# Altium PCB EIS_Flow.PcbDoc
Units mm, origin at the board's own origin, x right, y up, seen from the top; angles counter-clockwise.
Board outline 40 x 40 mm, 4 copper layers (Top Layer, Signal Layer 1, Signal Layer 2, Bottom Layer), stack 1.12 mm thick; 43 components, 30 nets, 141 pads, 53 vias.
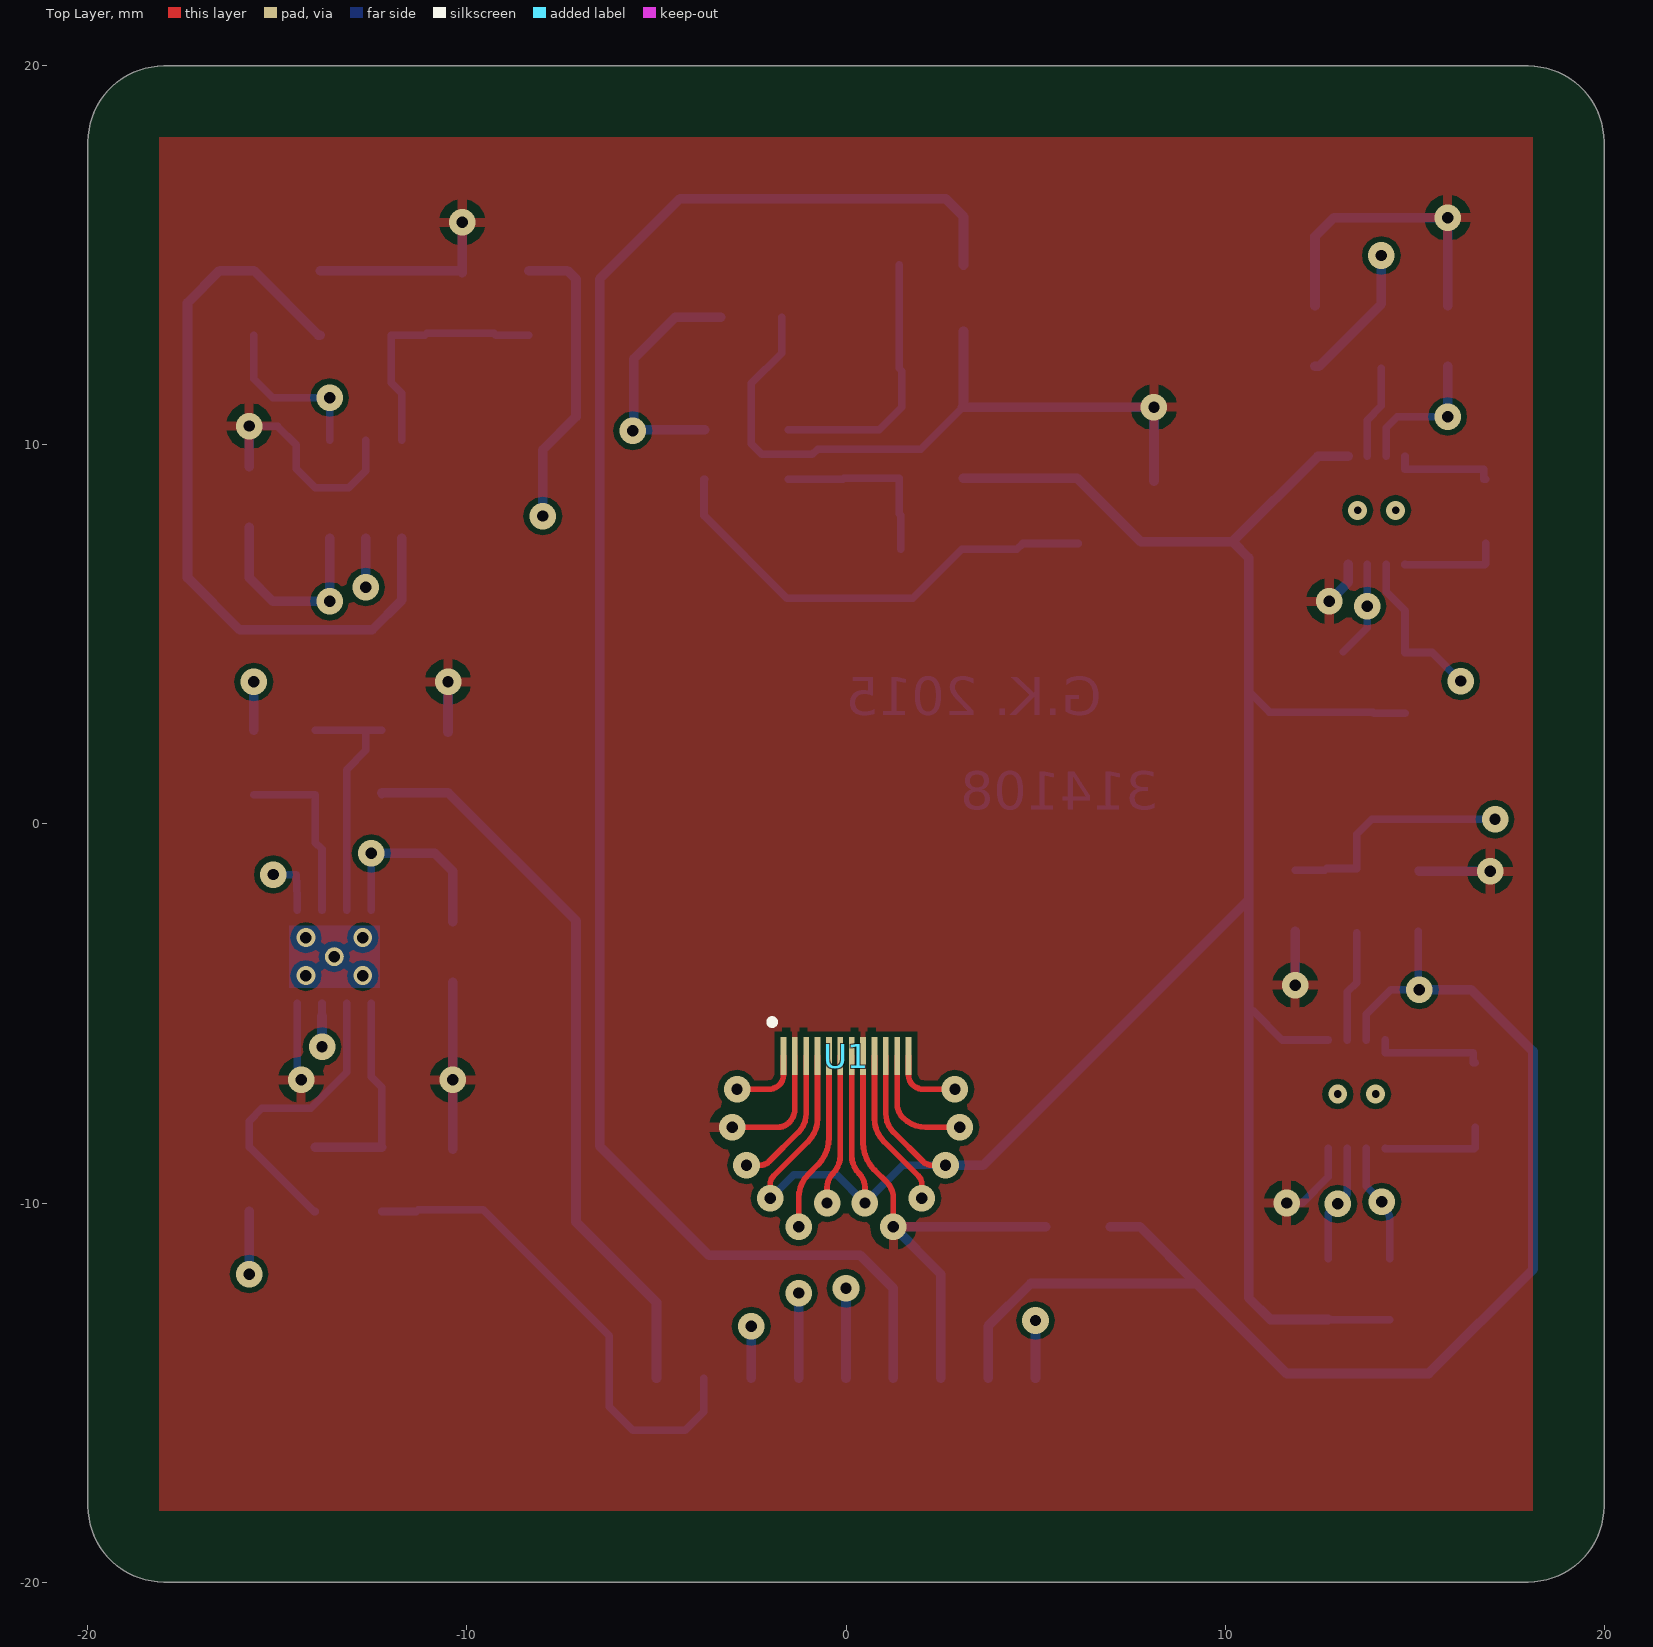
[diagram p0: Top Layer view]
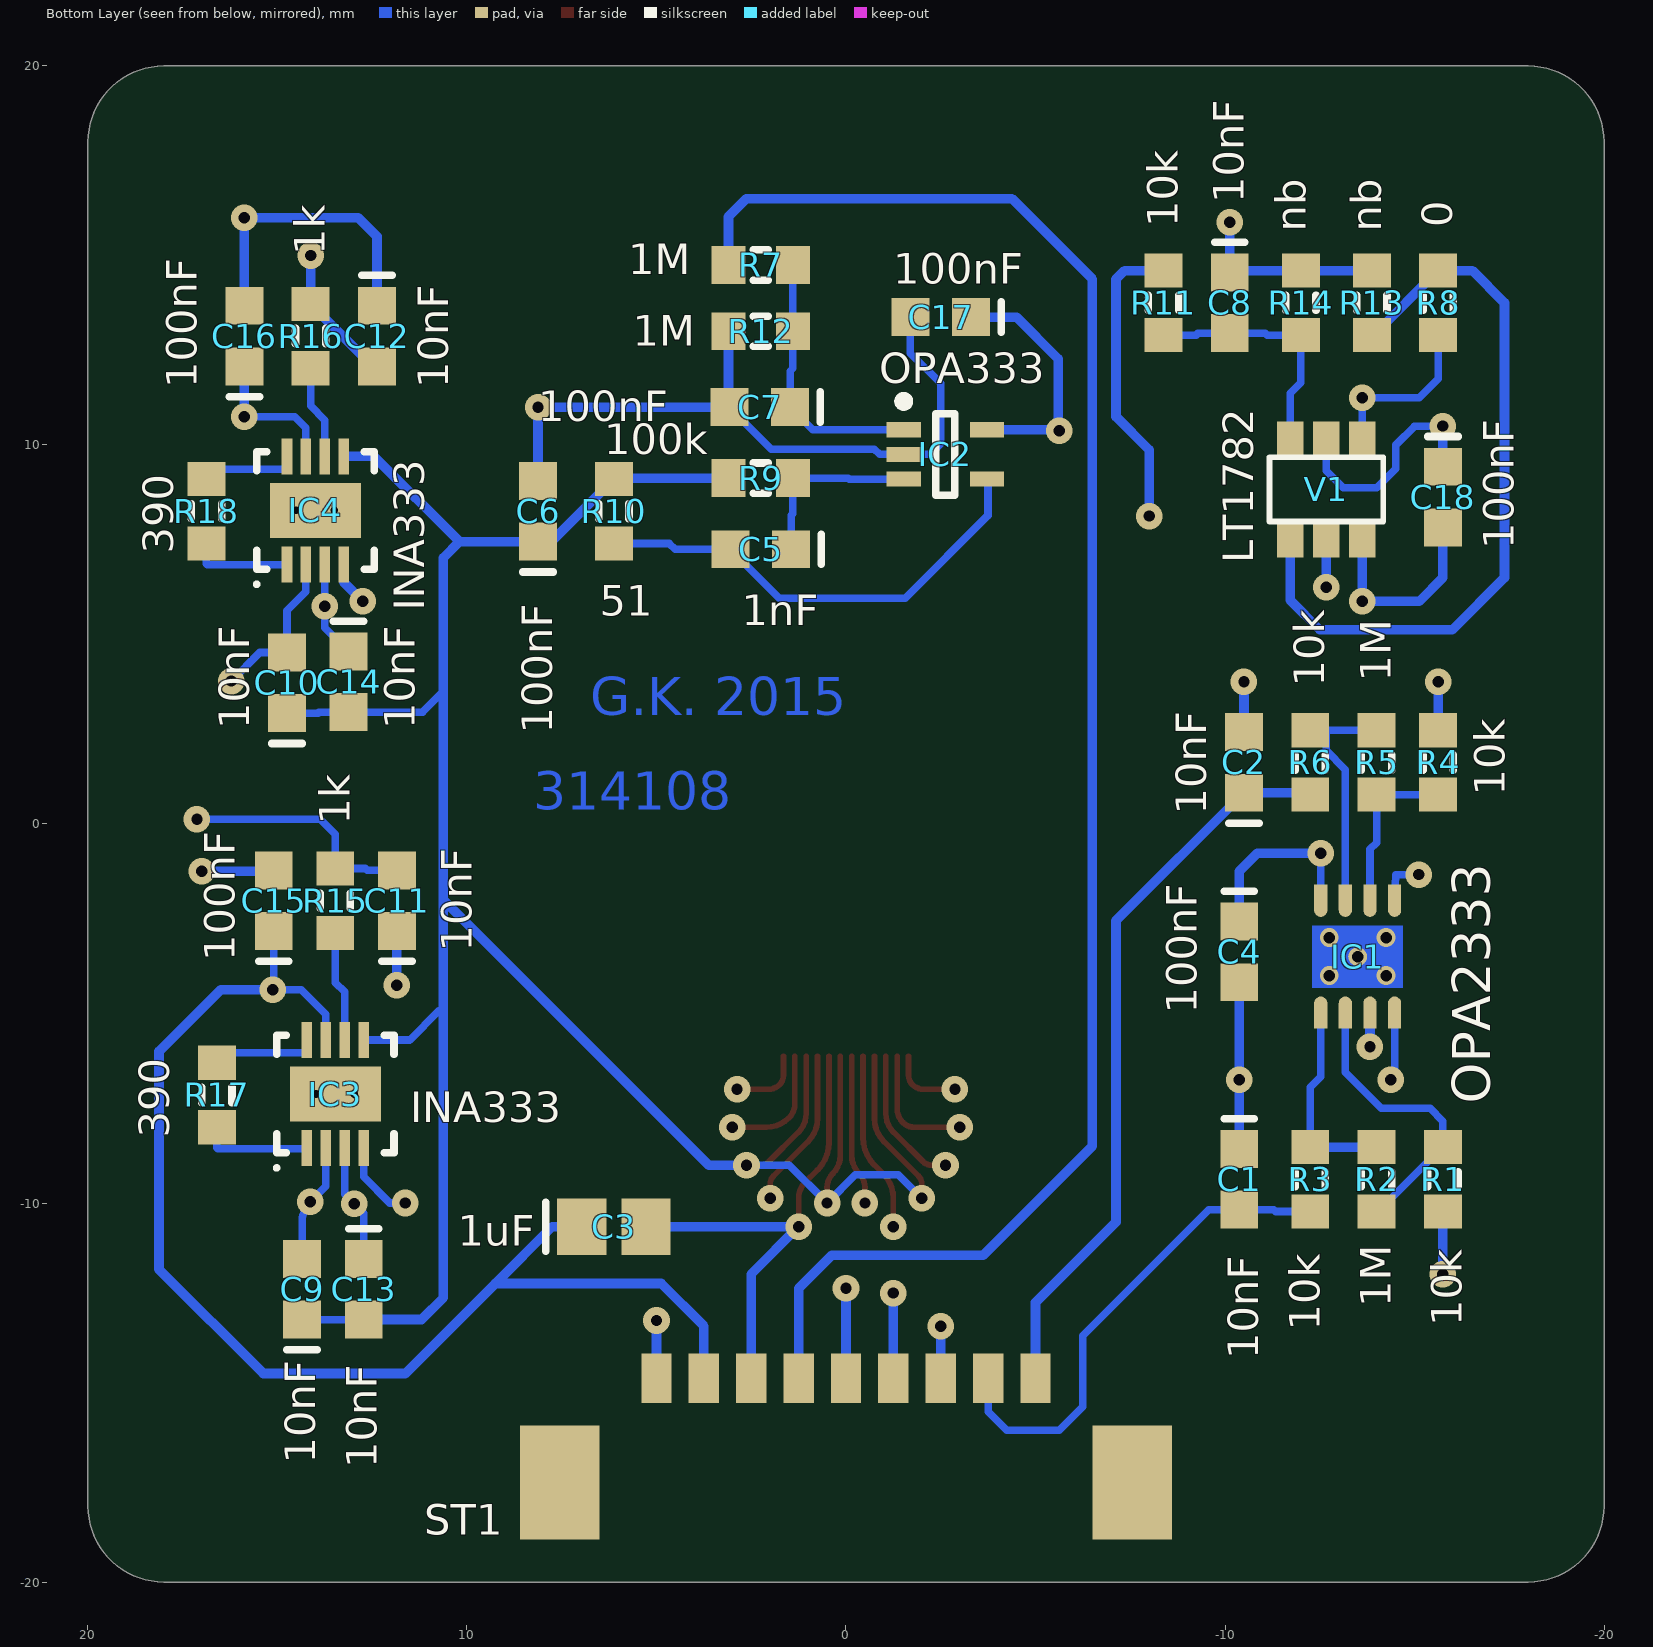
[diagram p1: Bottom Layer view, seen from below]
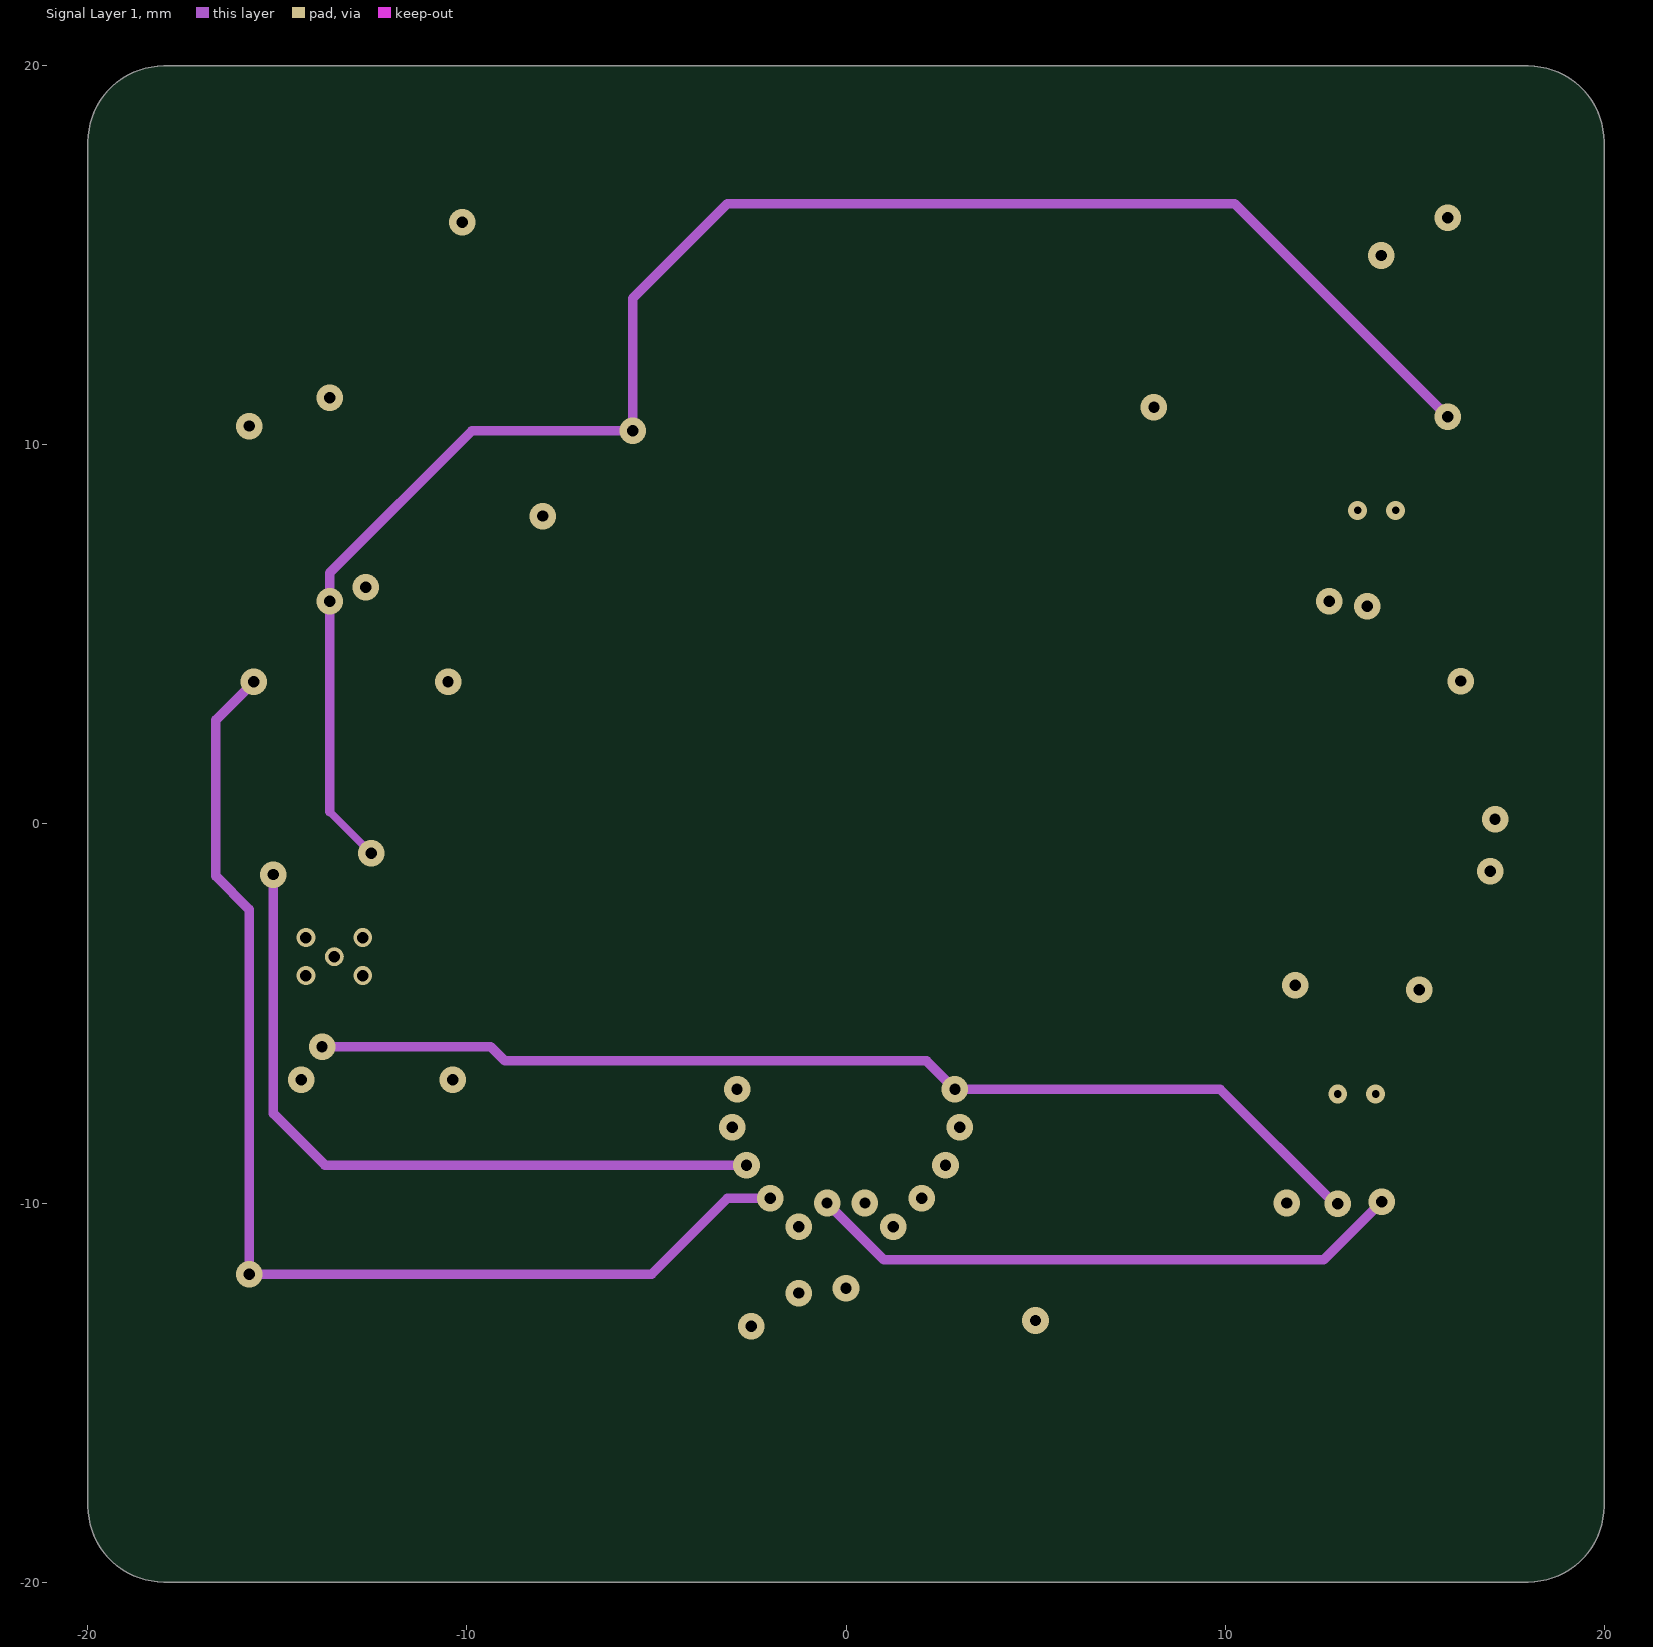
[diagram p2: Signal Layer 1]
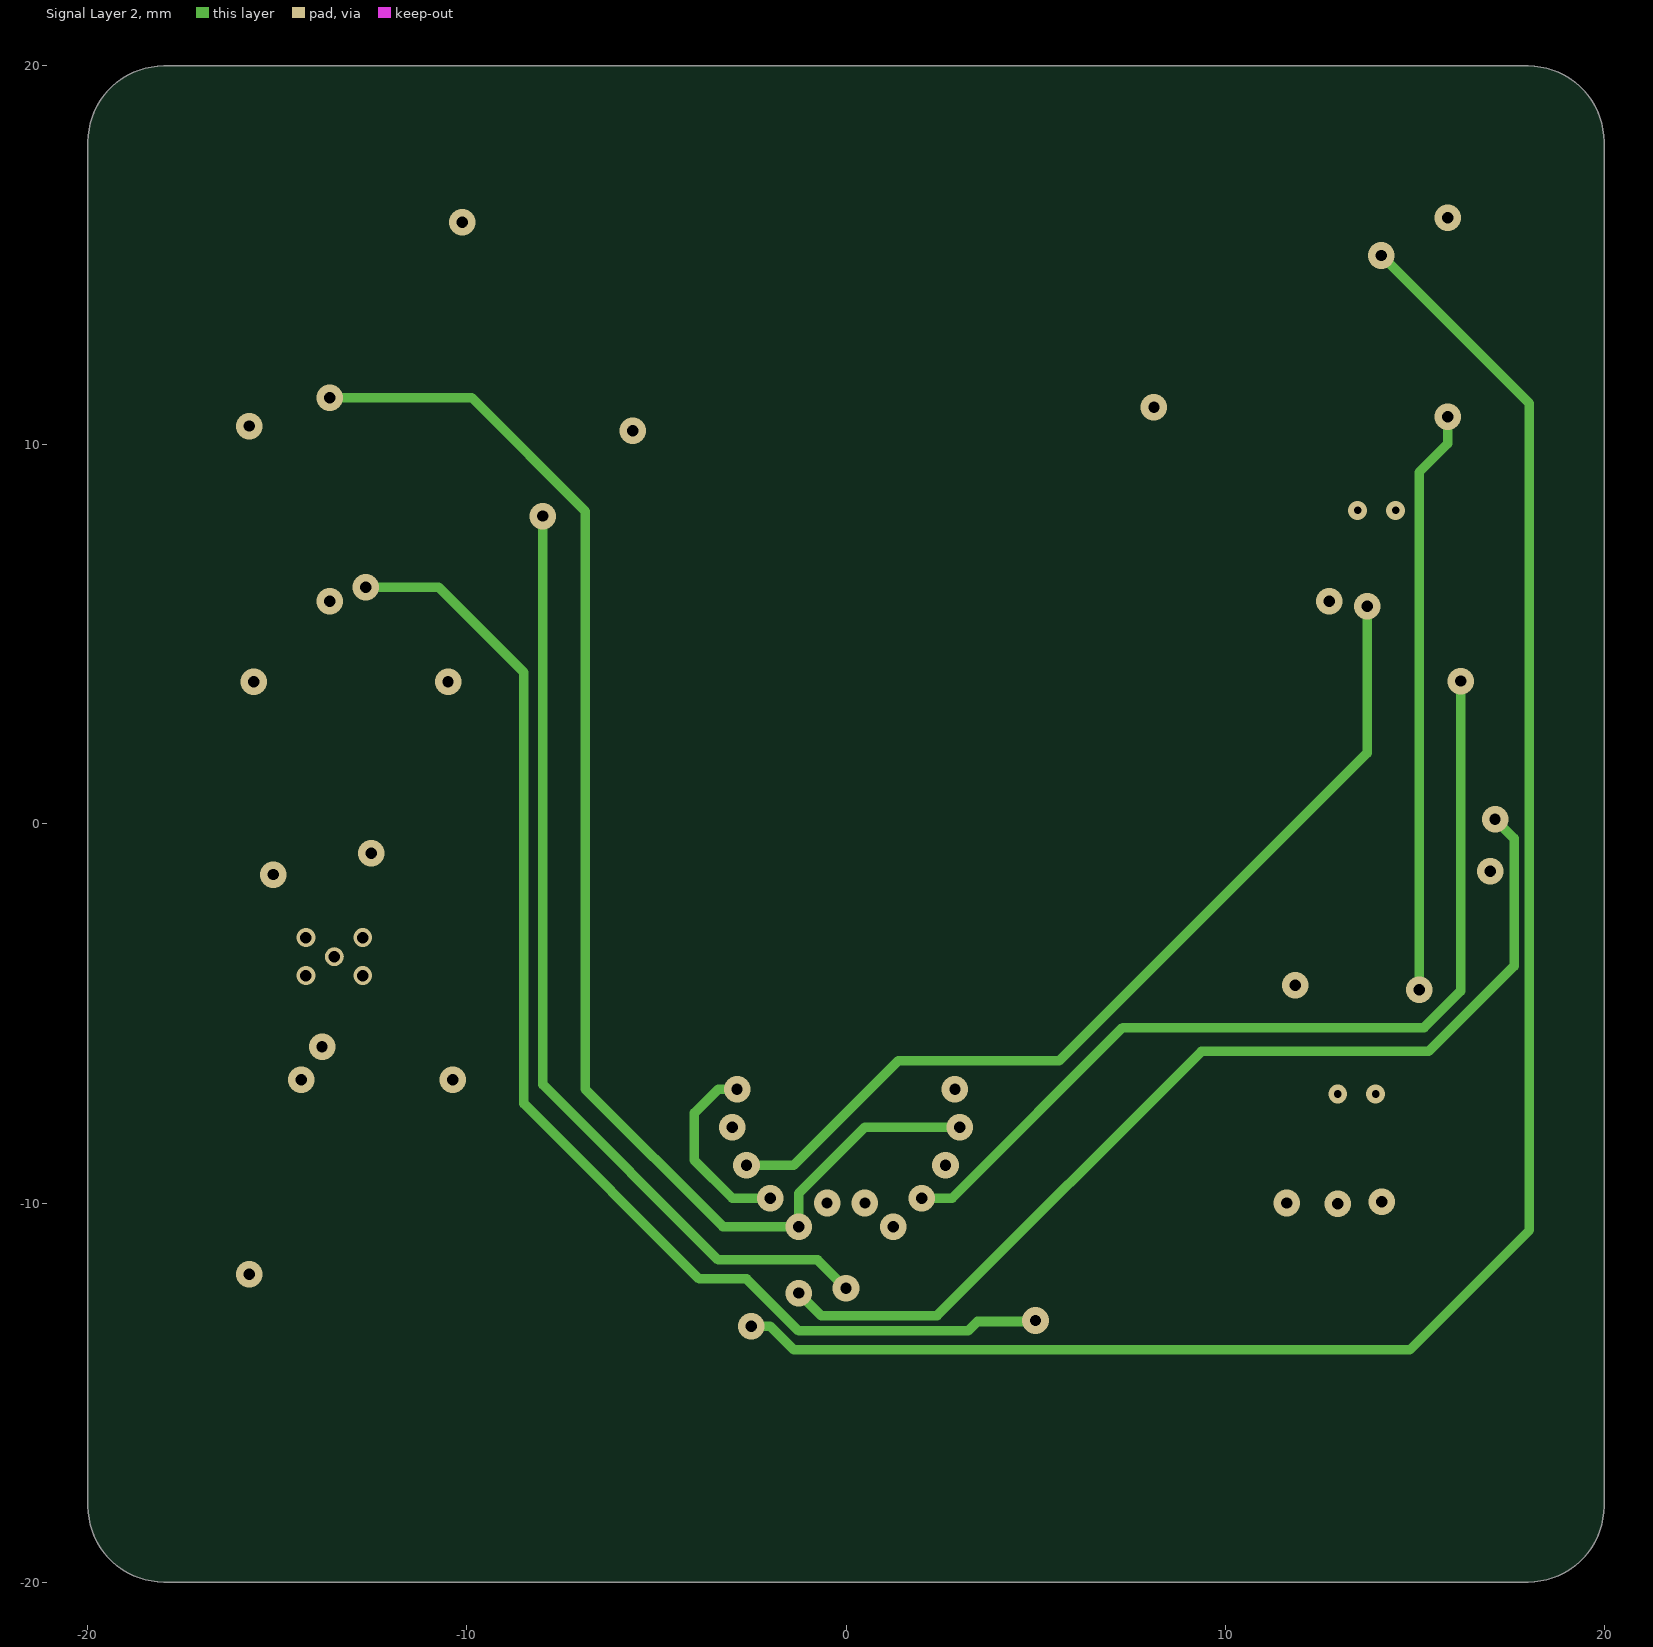
[diagram p3: Signal Layer 2]

## Layer stack, top to bottom
Top Solder: solder mask 0.0102, Solder Resist, Dk 3.5
Top Layer: signal copper 0.018
Dielectric 1: core 0.156, FR-4, Dk 4.2
Signal Layer 1: signal copper 0.036
Dielectric 3: prepreg 0.7, Dk 4.2
Signal Layer 2: signal copper 0.036
Dielectric 2: core 0.156, Dk 4.2
Bottom Layer: signal copper 0.018
Bottom Solder: solder mask 0.0102, Solder Resist, Dk 3.5

## Board outline
-20,-18 -20,18 cw(c-18,18) -18,20 18,20 cw(c18,18) 20,18 20,-18 cw(c18,-18) 18,-20 -18,-20 cw(c-18,-18)

## Design rules (kind name [scope] priority, off if disabled: settings)
Clearance [All] p1: gap=0.15
PolygonConnect [All] p1: connectstyle=Relief reliefconductorwidth=0.254 reliefentries=4 polygonreliefangle="90 Angle" airgapwidth=0.254
RoutingVias [All] p1: holewidth=0.3 width=0.7 viastyle="Through Hole" minholewidth=0.3 minwidth=0.7 maxholewidth=0.3 maxwidth=0.7
SolderMaskExpansion [All] p1: expansion=0.102
Width [All] p1: maxlimit=0.254 minlimit=0.15 preferedwidth=0.2
30 further rules are at their usual default settings.

## Components (designator, comment, footprint, x,y, rotation, side; value= is the part's Value field where it differs from the comment)
C1 "10nF" CAPC1608N -10.375,-9.375 r270 bottom
C2 "10nF" CAPC1608N -10.5,1.625 r90 bottom
C3 "1uF" CAPC2012N 6.125,-10.625 r180 bottom
C4 "100nF" CAPC1608N -10.375,-3.375 r270 bottom
C5 "1nF" CAPC1608N 2.25,7.25 r0 bottom
C6 "100nF" CAPC1608N 8.125,8.25 r90 bottom
C7 "100nF" CAPC1608N 2.275,11 r0 bottom
C8 "10nF" CAPC1608N -10.125,13.75 r270 bottom
C9 "10nF" CAPC1608N 14.35,-12.275 r90 bottom
C10 "10nF" CAPC1608N 14.75,3.725 r90 bottom
C11 "10nF" CAPC1608N 11.85,-2.025 r90 bottom
C12 "10nF" CAPC1608N 12.375,12.875 r270 bottom
C13 "10nF" CAPC1608N 12.725,-12.275 r270 bottom
C14 "10nF" CAPC1608N 13.125,3.75 r270 bottom
C15 "100nF" CAPC1608N 15.1,-2.025 r90 bottom
C16 "100nF" CAPC1608N 15.875,12.875 r90 bottom
C17 "100nF" CAPC1608N -2.5,13.375 r0 bottom
C18 "100nF" CAPC1608N -15.75,8.625 r270 bottom
IC1 "OPA2333" "TI DRB (S-PVON-N8)" -13.5,-3.5 r180 bottom
IC2 "OPA333" TI-DCK5_V -2.623,9.75 r180 bottom
IC3 "INA333" TI-DRG8-2400X1450TP_V 13.475,-7.125 r90 bottom
IC4 "INA333" TI-DRG8-2400X1450TP_V 14,8.275 r90 bottom
R1 "10k" RESC1608N -15.75,-9.375 r90 bottom
R2 "1M" RESC1608N -14,-9.375 r90 bottom
R3 "10k" RESC1608N -12.25,-9.375 r270 bottom
R4 "10k" RESC1608N -15.625,1.625 r270 bottom
R5 "1M" RESC1608N -14,1.625 r90 bottom
R6 "10k" RESC1608N -12.25,1.625 r270 bottom
R7 "1M" RESC1608N 2.25,14.75 r180 bottom
R8 "0" RESC1608N -15.625,13.75 r270 bottom
R9 "100k" RESC1608N 2.25,9.125 r0 bottom
R10 "51" RESC1608N 6.125,8.25 r270 bottom
R11 "10k" RESC1608N -8.375,13.75 r270 bottom
R12 "1M" RESC1608N 2.25,13 r0 bottom
R13 "nb" RESC1608N -13.875,13.75 r270 bottom
R14 "nb" RESC1608N -12,13.75 r270 bottom
R15 "1k" RESC1608N 13.475,-2.025 r270 bottom
R16 "1k" RESC1608N 14.125,12.875 r270 bottom
R17 "390" RESC1608N 16.6,-7.15 r270 bottom
R18 "390" RESC1608N 16.875,8.25 r270 bottom
ST1 "Molex  533980971" "Picoblade 9*1,25V" 0,-16 r180 bottom locked
U1 "HS2D-Flow" Bond_Flow_12p 0,0 r90 top
V1 "LT1782" SOT23-6 -13.625,10.125 r0 bottom

## Footprints (in the part's own frame and the unit in brackets; to place one, negate y for a bottom-side part, rotate by r counter-clockwise, add the part's x,y. Pads: shape width x height; smd on the part's side, far side on the other; paste and mask are expansions set on the pad)
Bond_Flow_12p [mm] "Chip in PCB-Tasche buendig einkleben (600µm tiefe Fräsung)"
  rect 1x0.15 smd paste-1: 1(-6.125,1.65) 2(-6.125,1.35) 3(-6.125,1.05) 4(-6.125,0.75) 5(-6.125,0.45) 6(-6.125,0.15) 7(-6.125,-0.15) 8(-6.125,-0.45) 9(-6.125,-0.75) 10(-6.125,-1.05) 11(-6.125,-1.35) 12(-6.125,-1.65)
  silkscreen extent -5.3,1.87 -5.15,2.03, body extent -4.9,-1 1.1,1, height 0.01
CAPC1608N [mm]
  rect 1x1 smd: 1(-0.8,0) 2(0.8,0)
  silkscreen extent -1.6,-0.4 -1.6,0.4, body extent -0.87,-0.48 0.87,0.48, height 0.85
CAPC2012N [mm] "Chip Capacitor, Body 2.0x1.3mm, IPC Medium Density"
  rect 1.3x1.5 smd: 1(-0.85,0) 2(0.85,0)
  silkscreen extent -1.8,-0.65 -1.8,0.65, body extent -1.1,-0.72 1.1,0.72, height 1.1
"Picoblade 9*1,25V" [mm]
  rect 0.8x1.3 smd: 1(-5,1.375) 2(-3.75,1.375) 3(-2.5,1.375) 4(-1.25,1.375) 5(0,1.375) 6(1.25,1.375) 7(2.5,1.375) 8(3.75,1.375) 9(5,1.375)
  rect 2.1x3 smd: ""(-7.55,-1.375) ""(7.55,-1.375)
  body extent -8.2,-2.6 8.2,1.6, height 4.7
RESC1608N [mm] "Chip Resistor, Body 1.6x0.8mm, IPC Medium Density"
  rect 0.9x1 smd: 1(-0.85,0) 2(0.85,0)
  silkscreen extent -0.2,-0.4 0.2,0.4, body extent -0.85,-0.48 0.85,0.48, height 0.6
SOT23-6 [mm]
  rect 0.7x1 smd: 1(0,0) 2(0.95,0) 3(1.9,0) 4(1.9,2.59) 5(0.95,2.59) 6(0,2.59)
  silkscreen extent -0.55,0.44 2.45,2.14, body extent -0.44,0.15 2.35,2.57, height 1.09
"TI DRB (S-PVON-N8)" [mm] "TI DRB; 8 Pin; OPA2333"
  rect 0.35x0.675 smd paste-0.025 mask+0.07: 1(-0.975,-1.563) 2(-0.325,-1.563) 3(0.325,-1.563) 4(0.975,-1.563) 5(0.975,1.562) 6(0.325,1.562) 7(-0.325,1.562) 8(-0.975,1.562)
  round 0.35 smd paste-0.025 mask+0.07: 1(-0.975,-1.225) 2(-0.325,-1.225) 3(0.325,-1.225) 4(0.975,-1.225) 5(0.975,1.225) 6(0.325,1.225) 7(-0.325,1.225) 8(-0.975,1.225)
  round 0.5 hole 0.3 mask-0.2: 9(0,0)
  Top Layer region: -1.2,0.825 1.2,0.825 1.2,-0.825 -1.2,-0.825
  body extent -1.57,-1.57 1.57,1.57, height 1.01
TI-DCK5_V [mm] "SOT23, 5-Leads, Body 2x1.25mm, Pitch 0.65mm"
  rect 0.9x0.4 smd: 1(-1.1,0.65) 2(-1.1,0) 3(-1.1,-0.65) 4(1.1,-0.65) 5(1.1,0.65)
  silkscreen extent -1.23,-1.07 0.25,1.52, body extent -0.63,-1 0.63,1, height 1.1
TI-DRG8-2400X1450TP_V [mm] "SON, 8-Leads, Body 3x3mm, Pitch 0.5mm, Thermal Pad 2.4x1.45mm"
  rect 0.95x0.28 smd: 1(-1.425,0.75) 2(-1.425,0.25) 3(-1.425,-0.25) 4(-1.425,-0.75) 5(1.425,-0.75) 6(1.425,-0.25) 7(1.425,0.25) 8(1.425,0.75)
  rect 1.45x2.4 smd: 9(0,0)
  silkscreen extent -2,-1.55 1.55,1.6, body extent -1.5,-1.5 1.5,1.5, height 0.8

## Part data
C1 C2 C3 C4 C5 C6 C7 C8 C9 C10 C11 C12 C13 C14 C15 C16 C17 C18: library part "Kondensator SMD Keramik"
IC1: library part OPA2333AIDRBT, "Dual micro Power OP"
IC2: library part OPA333AIDCKT, "17 uA, MicroPower, Precision, Zero Drift CMOS Operational Amplifier, 1.8 to 5.5 V, -40 to 125 degC, 5-pin SOT23 (DCK5), Green (RoHS & no Sb/Br)"
IC3 IC4: "Instrumentation Amplifier"
R1 R2 R3 R4 R5 R6 R7 R8 R9 R10 R11 R12 R13 R14 R15 R16 R17 R18: library part "Widerstand SMD"
ST1: library part MOLEX_Picoblade_9V
U1: "2d Strömungssensor Hahn-Schickard"
V1: library part LT1782_SD

## Via types
v1: diameter 0.7, hole 0.3, Top Layer to Bottom Layer, tented top, 45 vias
v2: diameter 0.5, hole 0.2, Top Layer to Bottom Layer, tented top, 4 vias
v3: diameter 0.5, hole 0.3, Top Layer to Bottom Layer, tented top, 4 vias

## Nets (pads, with @x,y where several pads share a name; then routed paths per layer and width w, separated by ;. In a path a pad name is that pad's centre, name@x,y a point inside that pad or via, vN(x,y) a via of type N, cw(c..) or ccw(c..) an arc to the next point about the centre after c; other vN are vias at no path point)
A3V: C3.1 C4.1 C15.1 C16.1 C17.1 C18.2 IC1.8 IC2.5 IC3.7 IC4.7 ST1.2 V1.6 | length 116.3
  Signal Layer 1 w0.2: -13.625,0.325 v1(-12.525,-0.775)
  Signal Layer 1 w0.254: -13.625,0.325 v1(-13.625,5.875) -13.625,6.625 -9.875,10.375 v1(-5.625,10.375) -5.625,13.875 -3.13,16.37 10.255,16.37 v1@15.66,10.965
  Signal Layer 2 w0.254: v1(15.125,-4.375) 15.125,9.283 15.875,10.033 v1(15.875,10.75)
  Bottom Layer w0.2: IC1.8@-12.525,-2.275 -12.525,-1.938 v1(-12.525,-0.775) ; IC3.7 13.725,-5.025 14.375,-4.375 v1(15.125,-4.375) ; IC4.7 14.25,10.45 14.55,10.75 v1(15.875,10.75) ; v1@15.1,-4.375 C15.1
  Bottom Layer w0.254: C18.2 -15.75,6.5 -15.125,5.875 v1(-13.625,5.875) V1.6 ; v1(-12.525,-0.775) -10.85,-0.775 -10.375,-1.25 C4.1 ; IC2.5 -5.6,10.4 -5.6,12.275 -4.5,13.375 C17.1 ; ST1.2 3.75,-13.25 4.875,-12.125 9.25,-12.125 ; C3.1 7.75,-10.625 9.25,-12.125 ; v1(15.125,-4.375) 16.5,-4.375 18.125,-6 18.125,-11.75 15.375,-14.5 11.625,-14.5 9.25,-12.125 ; v1(15.875,10.75) C16.1
AGND: C1.1 C2.2 C3.2 C4.2 C6.2 C7.2 C8.1 C11.1 C12.1 C15.2 C16.2 C17.2 C18.1 IC1.4 IC2.2 IC3.4 IC4.4 R12.2 R13.1 R14.1 ST1.3 U1.2 U1.8 V1.2 | length 71.5
  Top Layer w0.15: v1(-3,-8) -1.802,-8 ccw(c-1.802,-7.573) -1.5,-7.875 ccw(c-1.862,-7.513) -1.35,-7.513 U1.2 ; U1.8 0.45,-8.401 ; 1.073,-9.448 cw(c0.646,-9.875) 1.25,-9.875 v1(1.25,-10.625) ; 1.073,-9.448 0.75,-9.125 ; 0.45,-8.401 ccw(c1.474,-8.401) 0.75,-9.125 ; 0.45,-8.401 ccw(c1.474,-8.401) 0.75,-9.125 ; 0.45,-8.401 ccw(c1.474,-8.401) 0.75,-9.125 ; 0.45,-8.401 ccw(c1.474,-8.401) 0.75,-9.125
  Bottom Layer w0.2: v1(-15.75,10.5) -15,10.5 -14.5,10 -14.5,9.375 -14,8.875 -13.125,8.875 -12.675,9.325 V1.2 ; v1@-14.475,-6.75 -14.475,-5.063 IC1.4@-14.475,-4.725 ; C17.2 -1.7,12.425 -2.5,11.625 -2.5,10.028 -2.223,9.75 IC2.2 -0.892,9.75 -0.749,9.893 1.968,9.893 C7.2 ; v1(11.625,-10) 12.034,-10 12.725,-9.309 IC3.4 ; C15.2 C15.2@15.125,-1.25
  Bottom Layer w0.254: C18.1 v1(-15.75,10.5) ; R13.1 -10.175,14.6 C8.1 v1(-10.125,15.875) ; C2.2 v1(-10.5,3.75) ; C1.1 v1(-10.375,-6.75) C4.2 ; ST1.3 2.5,-11.875 v1(1.25,-10.625) C3.2 ; R12.2 3.1,11.025 C7.2 v1(8.125,11) C6.2 ; v1(11.85,-4.25) C11.1 ; C12.1 12.375,15.5 12.875,16 v1(15.875,16) C16.2 ; v1(12.75,5.875) 13.25,6.375 IC4.4 ; C15.2@15.125,-1.25 v1(17,-1.25)
  other v1: -14.375,-6.75
FLOW_X: C11.2 R15.1 ST1.6 | length 35.6
  Signal Layer 2 w0.254: v1(-1.25,-12.375) -0.654,-12.971 2.404,-12.971 9.375,-6 15.375,-6 17.627,-3.748 17.627,-0.377 v1(17.125,0.125)
  Bottom Layer w0.2: C11.2 12.636,-1.225 12.686,-1.175 R15.1 13.475,-0.275 13.875,0.125 v1(17.125,0.125)
  Bottom Layer w0.254: ST1.6 v1(-1.25,-12.375)
FLOW_Y: C12.2 R16.1 ST1.7 | length 54.5
  Signal Layer 2 w0.254: v1(-2.5,-13.25) -2,-13.25 -1.375,-13.875 14.875,-13.875 18.031,-10.719 18.031,11.094 v1(14.125,15)
  Bottom Layer w0.254: ST1.7 v1@-2.5,-13.25 ; C12.2 12.475,12.075 R16.1 v1(14.125,15)
HTS: R8.2 U1.5 U1.11 V1.1 | length 51.9
  Top Layer w0.15: v1(-1.25,-10.625) -1.25,-9.875 cw(c-0.345,-9.875) -0.985,-9.235 -0.75,-9 ccw(c-1.474,-8.276) -0.45,-8.276 U1.5 ; U1.11 1.35,-7.388 ; v1(3,-8) 2.104,-8 ; 1.35,-7.388 ccw(c1.862,-7.388) 1.5,-7.75 ; 1.35,-7.388 ccw(c1.862,-7.388) 1.5,-7.75 ; 1.35,-7.388 ccw(c1.862,-7.388) 1.5,-7.75 ; 1.35,-7.388 ccw(c1.862,-7.388) 1.5,-7.75 ; 1.5,-7.75 ccw(c2.104,-7.146) 2.104,-8 ; 1.5,-7.75 ccw(c2.104,-7.146) 2.104,-8 ; 1.5,-7.75 ccw(c2.104,-7.146) 2.104,-8 ; 1.5,-7.75 ccw(c2.104,-7.146) 2.104,-8
  Signal Layer 2 w0.254: v1(-13.625,11.25) -9.875,11.25 -6.875,8.25 -6.875,-7 -3.25,-10.625 v1(-1.25,-10.625) -1.25,-9.75 0.5,-8 v1(3,-8)
  Bottom Layer w0.2: R8.2 -15.625,11.75 -15.125,11.25 v1(-13.625,11.25) V1.1
HTS_SD: ST1.1 V1.5 | length 35.6
  Signal Layer 2 w0.254: v1(-12.675,6.25) -10.75,6.25 -8.5,4 -8.5,-7.375 -3.875,-12 -2.625,-12 -1.25,-13.375 3.219,-13.375 3.469,-13.125 v1@5.125,-13.125
  Bottom Layer w0.2: v1@5,-13.172 cw(c5.067,-13.172) 5.02,-13.125 v1@5.125,-13.125
  Bottom Layer w0.254: v1(-12.675,6.25) V1.5 ; ST1.1 v1@5,-13.172
  other v1: 5,-13.1
HTS_SOLL: R11.1 ST1.5 | length 35.6
  Signal Layer 2 w0.254: v1(-8,8.125) -8,-6.875 -3.375,-11.5 -0.75,-11.5 v1(0,-12.25)
  Bottom Layer w0.254: R11.1 -7.35,14.6 -7.125,14.375 -7.125,10.75 -8,9.875 v1(-8,8.125) ; ST1.5 v1(0,-12.25)
NetC5_1: C5.1 IC2.3 R9.1 | length 4.8
  Bottom Layer w0.2: IC2.3 -0.089,9.1 -0.064,9.125 R9.1 1.4,8.191 1.45,8.141 C5.1
NetC5_2: C5.2 IC2.4 R10.2 | length 12.4
  Bottom Layer w0.2: IC2.4 -3.747,9.1 -3.747,8.141 -1.562,5.956 1.756,5.956 C5.2 4.508,7.25 4.658,7.4 R10.2
NetC7_1: C7.1 IC2.1 R7.2 R12.1 | length 7
  Bottom Layer w0.2: IC2.1 0.875,10.4 C7.1 1.475,11.951 1.4,12.026 R12.1 R7.2
NetC8_2: C8.2 R11.2 R14.2 V1.3 | length 6.6
  Bottom Layer w0.2: V1.3 -11.725,11.366 -12,11.641 R14.2 -11.113,12.9 -11.063,12.95 C8.2 -9.284,12.95 -9.234,12.9 R11.2
NetIC1_1: IC1.1 R2.2 R3.1 | length 5.7
  Bottom Layer w0.2: IC1.1@-12.525,-4.725 -12.525,-5.063 -12.525,-6.672 -12.25,-6.947 R3.1
  Bottom Layer w0.254: R2.2 R3.1
NetIC1_2: IC1.2 R1.2 R2.1 | length 8.1
  Bottom Layer w0.2: R2.1 -14.035,-10.225 -15.735,-8.525 R1.2 -15.75,-7.838 -15.412,-7.5 -14.125,-7.5 -13.175,-6.55 -13.175,-5.063 IC1.2@-13.175,-4.725
NetIC1_6: IC1.6 R4.2 R5.1 | length 4.7
  Bottom Layer w0.2: R4.2 R5.1 -14,-0.491 -13.825,-0.666 -13.825,-1.938 IC1.6@-13.825,-2.275
NetIC1_7: IC1.7 R5.2 R6.1 | length 6.7
  Bottom Layer w0.2: R5.2 R6.1@-12.667,2.475 ; IC1.7@-13.175,-2.275 -13.175,-1.938 -13.175,1.435 -12.667,1.943 R6.1@-12.667,2.475 ; R6.1 R6.1@-12.667,2.475
NetIC3_1: IC3.1 R17.2 | length 3
  Bottom Layer w0.2: IC3.1 14.225,-8.573 16.575,-8.573 16.6,-8.547 R17.2
NetIC3_6: IC3.6 R15.2 | length 2.9
  Bottom Layer w0.2: IC3.6 13.225,-4.432 13.475,-4.182 R15.2
NetIC3_8: IC3.8 R17.1 | length 3
  Bottom Layer w0.2: IC3.8 14.225,-6.033 16.548,-6.033 16.548,-6.3 R17.1
NetIC4_1: IC4.1 R18.2 | length 2.7
  Bottom Layer w0.2: IC4.1 14.75,6.845 16.85,6.845 16.875,6.871 R18.2
NetIC4_6: IC4.6 R16.2 | length 2.5
  Bottom Layer w0.2: IC4.6 13.75,10.655 14.125,11.03 R16.2
NetIC4_8: IC4.8 R18.1 | length 2.7
  Bottom Layer w0.2: IC4.8 14.75,9.36 16.827,9.36 16.827,9.1 R18.1
NetR8_1: R8.1 R13.2 V1.4 | length 20
  Bottom Layer w0.254: R13.2 -13.925,12.9 R8.1 -16.525,14.6 -17.375,13.75 -17.375,6.5 -16,5.125 -12.5,5.125 -11.725,5.9 V1.4
REF1.25: C6.1 C9.1 C10.1 C13.2 C14.2 IC3.5 IC4.5 R1.1 R4.1 R9.2 R10.1 U1.1 U1.4 U1.7 U1.10 | length 115.1
  Top Layer w0.15: v1(-2.875,-7) -2.052,-7 ccw(c-2.052,-6.573) -1.75,-6.875 ccw(c-1.991,-6.634) -1.65,-6.634 U1.1 ; -2,-9.5 cw(c-1.698,-9.5) -1.912,-9.287 -1,-8.375 ccw(c-1.604,-7.771) -0.75,-7.771 U1.4 ; U1.7 0.15,-8.75 ; v1(0.5,-10) 0.5,-9.595 ; U1.10 1.05,-7.642 ; v1(2.625,-9) 2.25,-9 cw(c2.25,-8.698) 2.037,-8.912 1.25,-8.125 ; 0.15,-8.75 ccw(c0.814,-8.75) 0.344,-9.219 ; 0.15,-8.75 ccw(c0.814,-8.75) 0.344,-9.219 ; 0.15,-8.75 ccw(c0.814,-8.75) 0.344,-9.219 ; 0.15,-8.75 ccw(c0.814,-8.75) 0.344,-9.219 ; 0.344,-9.219 cw(c-0.031,-9.595) 0.5,-9.595 ; 0.344,-9.219 cw(c-0.031,-9.595) 0.5,-9.595 ; 1.05,-7.642 ccw(c1.733,-7.642) 1.25,-8.125 ; 1.05,-7.642 ccw(c1.733,-7.642) 1.25,-8.125 ; 1.05,-7.642 ccw(c1.733,-7.642) 1.25,-8.125 ; 1.05,-7.642 ccw(c1.733,-7.642) 1.25,-8.125
  Signal Layer 1 w0.254: v1(-15.625,3.75) -16.625,2.75 -16.625,-1.375 -15.75,-2.25 v1(-15.75,-11.875) -5.125,-11.875 -3.125,-9.875 v1(-2,-9.875)
  Signal Layer 2 w0.254: v1(-2.875,-7) -3.375,-7 -4,-7.625 -4,-8.875 -3,-9.875 v1(-2,-9.875)
  Bottom Layer w0.2: v1(-2,-9.875) -1.375,-9.25 -0.25,-9.25 v1(0.5,-10) 1.5,-9 v1(2.625,-9) ; R10.1@6.1,9.125 R10.1 ; 10.625,3.5 11.175,2.95 C14.2 13.906,2.95 13.931,2.925 C10.1 ; 10.75,-4.934 11.516,-5.7 IC3.5 ; C13.2 C9.1
  Bottom Layer w0.254: v1(-15.75,-11.875) R1.1 ; R4.1 v1(-15.625,3.75) ; v1(2.625,-9) 3.625,-9 10.625,-2 ; R9.2 R10.1@6.1,9.125 ; R10.1 7.775,7.45 C6.1 10.2,7.45 ; C13.2 11.2,-13.075 10.625,-12.5 10.625,-2 ; IC4.5 12.45,9.7 10.2,7.45 ; 10.2,7.45 10.625,7.025 10.625,3.5 10.625,-2
REF2.5V: R7.1 ST1.4 | length 46.5
  Bottom Layer w0.254: ST1.4 1.25,-12.25 0.375,-11.375 -3.625,-11.375 -6.5,-8.5 -6.5,14.375 -4.375,16.5 2.625,16.5 3.1,16.025 R7.1
TPX_+: C13.1 IC1.3 IC3.3 U1.12 | length 34.6
  Top Layer w0.15: U1.12 1.65,-6.634 ccw(c1.991,-6.634) 1.75,-6.875 ccw(c2.052,-6.573) 2.052,-7 v1(2.875,-7)
  Signal Layer 1 w0.254: v1(-13.825,-5.875) -9.375,-5.875 -9,-6.25 2.125,-6.25 v1(2.875,-7) 9.875,-7 v1@12.875,-10
  Bottom Layer w0.2: IC1.3@-13.825,-5.063 IC1.3@-13.825,-4.725 ; C13.1 12.725,-10.274 13.225,-9.774 IC3.3
  Bottom Layer w0.254: v1(-13.825,-5.875) IC1.3@-13.825,-5.063
  other v1: 12.975,-10.024
TPX_-: C9.2 IC3.2 U1.6 | length 25.8
  Top Layer w0.15: v1(-0.5,-10) -0.5,-9.595 ; U1.6 -0.15,-8.75 ; -0.5,-9.595 cw(c0.031,-9.595) -0.344,-9.219 ; -0.5,-9.595 cw(c0.031,-9.595) -0.344,-9.219 ; -0.5,-9.595 cw(c0.031,-9.595) -0.344,-9.219 ; -0.5,-9.595 cw(c0.031,-9.595) -0.344,-9.219 ; -0.344,-9.219 ccw(c-0.814,-8.75) -0.15,-8.75 ; -0.344,-9.219 ccw(c-0.814,-8.75) -0.15,-8.75 ; -0.344,-9.219 ccw(c-0.814,-8.75) -0.15,-8.75 ; -0.344,-9.219 ccw(c-0.814,-8.75) -0.15,-8.75
  Signal Layer 1 w0.254: v1(-0.5,-10) 1,-11.5 12.605,-11.5 v1(14.135,-9.97)
  Bottom Layer w0.2: IC3.2 13.725,-9.56 v1(14.135,-9.97) ccw(c14.233,-9.97) 14.164,-10.039 cw(c13.714,-10.489) 14.35,-10.489 C9.2
TPY_+: C14.1 IC1.5 IC4.3 U1.3 | length 53.6
  Top Layer w0.15: v1(-2.625,-9) -2.25,-9 ccw(c-2.25,-8.698) -2.037,-8.912 -1.25,-8.125 ; U1.3 -1.05,-7.642 ; -1.25,-8.125 ccw(c-1.733,-7.642) -1.05,-7.642 ; -1.25,-8.125 ccw(c-1.733,-7.642) -1.05,-7.642 ; -1.25,-8.125 ccw(c-1.733,-7.642) -1.05,-7.642 ; -1.25,-8.125 ccw(c-1.733,-7.642) -1.05,-7.642
  Signal Layer 1 w0.254: v1(-15.11,-1.334) -15.11,-7.64 -13.75,-9 v1(-2.625,-9)
  Signal Layer 2 w0.254: v1(-2.625,-9) -1.375,-9 1.375,-6.25 5.625,-6.25 13.75,1.875 v1(13.75,5.75)
  Bottom Layer w0.2: v1(-15.11,-1.334) -14.5,-1.334 -14.475,-1.938 IC1.5@-14.475,-2.275 ; C14.1 13.75,5.175 IC4.3
TPY_-: C10.2 IC4.2 U1.9 | length 33.2
  Top Layer w0.15: U1.9 0.75,-7.771 ccw(c1.604,-7.771) 1,-8.375 1.912,-9.287 cw(c1.698,-9.5) 2,-9.5 v1(2,-9.875)
  Signal Layer 2 w0.254: v1(2,-9.875) 2.8,-9.875 7.3,-5.375 15.25,-5.375 16.218,-4.407 v1(16.218,3.772)
  Bottom Layer w0.2: IC4.2 14.25,6.125 14.75,5.625 C10.2 15.465,4.525 v1(16.218,3.772)
X+: C1.2 R3.2 ST1.8 | length 13.1
  Bottom Layer w0.2: R3.2 -11.341,-10.225 -11.291,-10.175 C1.2 -9.575,-10.175 -6.25,-13.5 -6.25,-15.375 -5.625,-16 -4.243,-16 -3.75,-15.507 ST1.8
Y+: C2.1 R6.2 ST1.9 | length 19.5
  Bottom Layer w0.2: R6.2 R6.2@-12.25,0.825
  Bottom Layer w0.254: R6.2@-12.25,0.825 C2.1 -7.125,-2.55 -7.125,-10.5 -5,-12.625 ST1.9
pads on no net: IC1.9 IC3.9 IC4.9 ST1.
copper on no net:
  other v2: 12.975,-7.125 13.975,-7.125 13.5,8.275 14.5,8.275
  other v3: -14.25,-4 -12.75,-4 -14.25,-3 -12.75,-3

## Polygon pours and split planes (outlines as drawn)
AGND on Top Layer "Top Layer-No Net" (solid, pour order 4): -18.125,18.125 18.125,18.125 18.125,-18.125 -18.125,-18.125 -18.125,18.125

## Other copper
Bottom Layer:
  text "G.K. 2015" at 6.75,2.875 h1
  text "314108" at 8.25,0.375 h1

## Silkscreen, mask and mechanical layers (free items; w line width, h text height)
Mechanical 1:
  the board outline again, w0.2